# Altium PCB Humidifier_PCB.PcbDoc
Units mm, origin at the board's own origin, x right, y up, seen from the top; angles counter-clockwise.
Board outline 60.7 x 79 mm, 2 copper layers (Top Layer, Bottom Layer), stack 1 mm thick; 28 components, 25 nets, 99 pads, 4 vias.
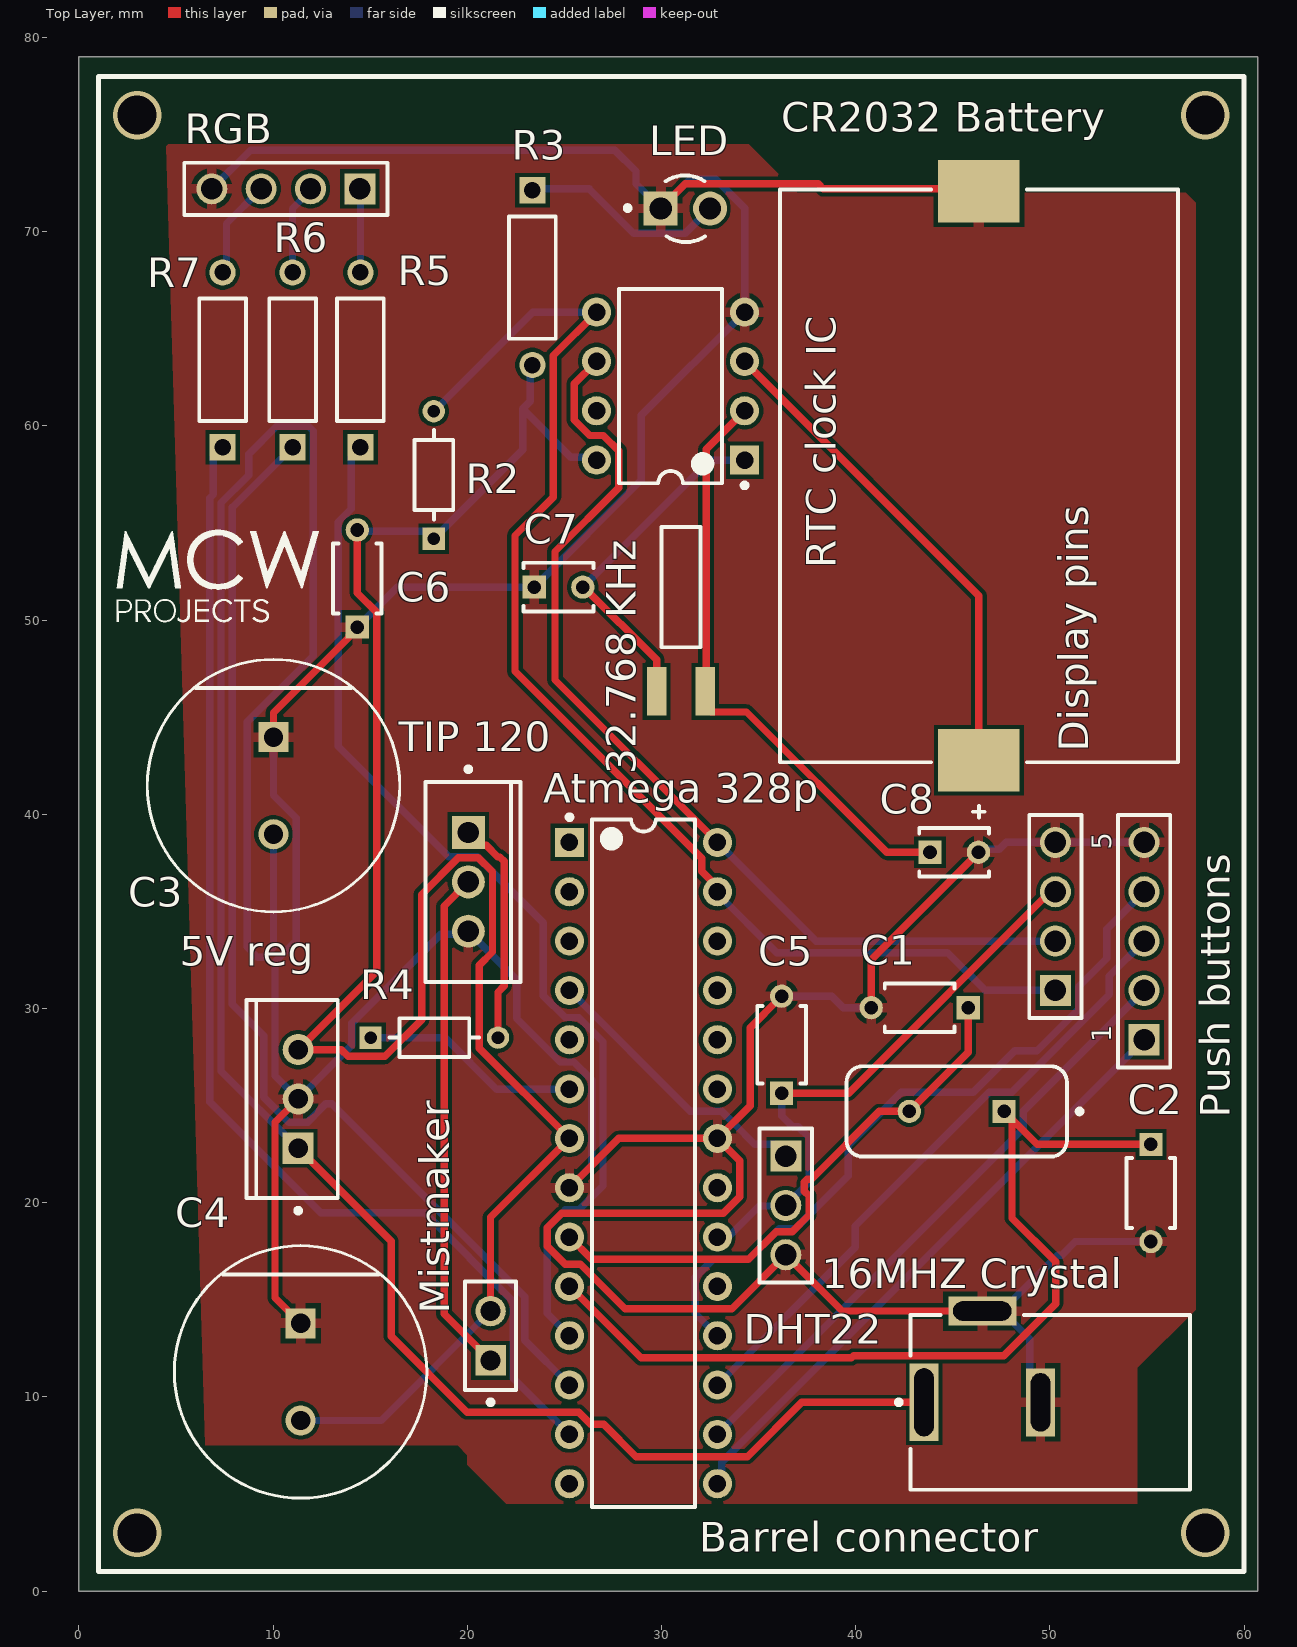
[diagram p0: Top Layer view]
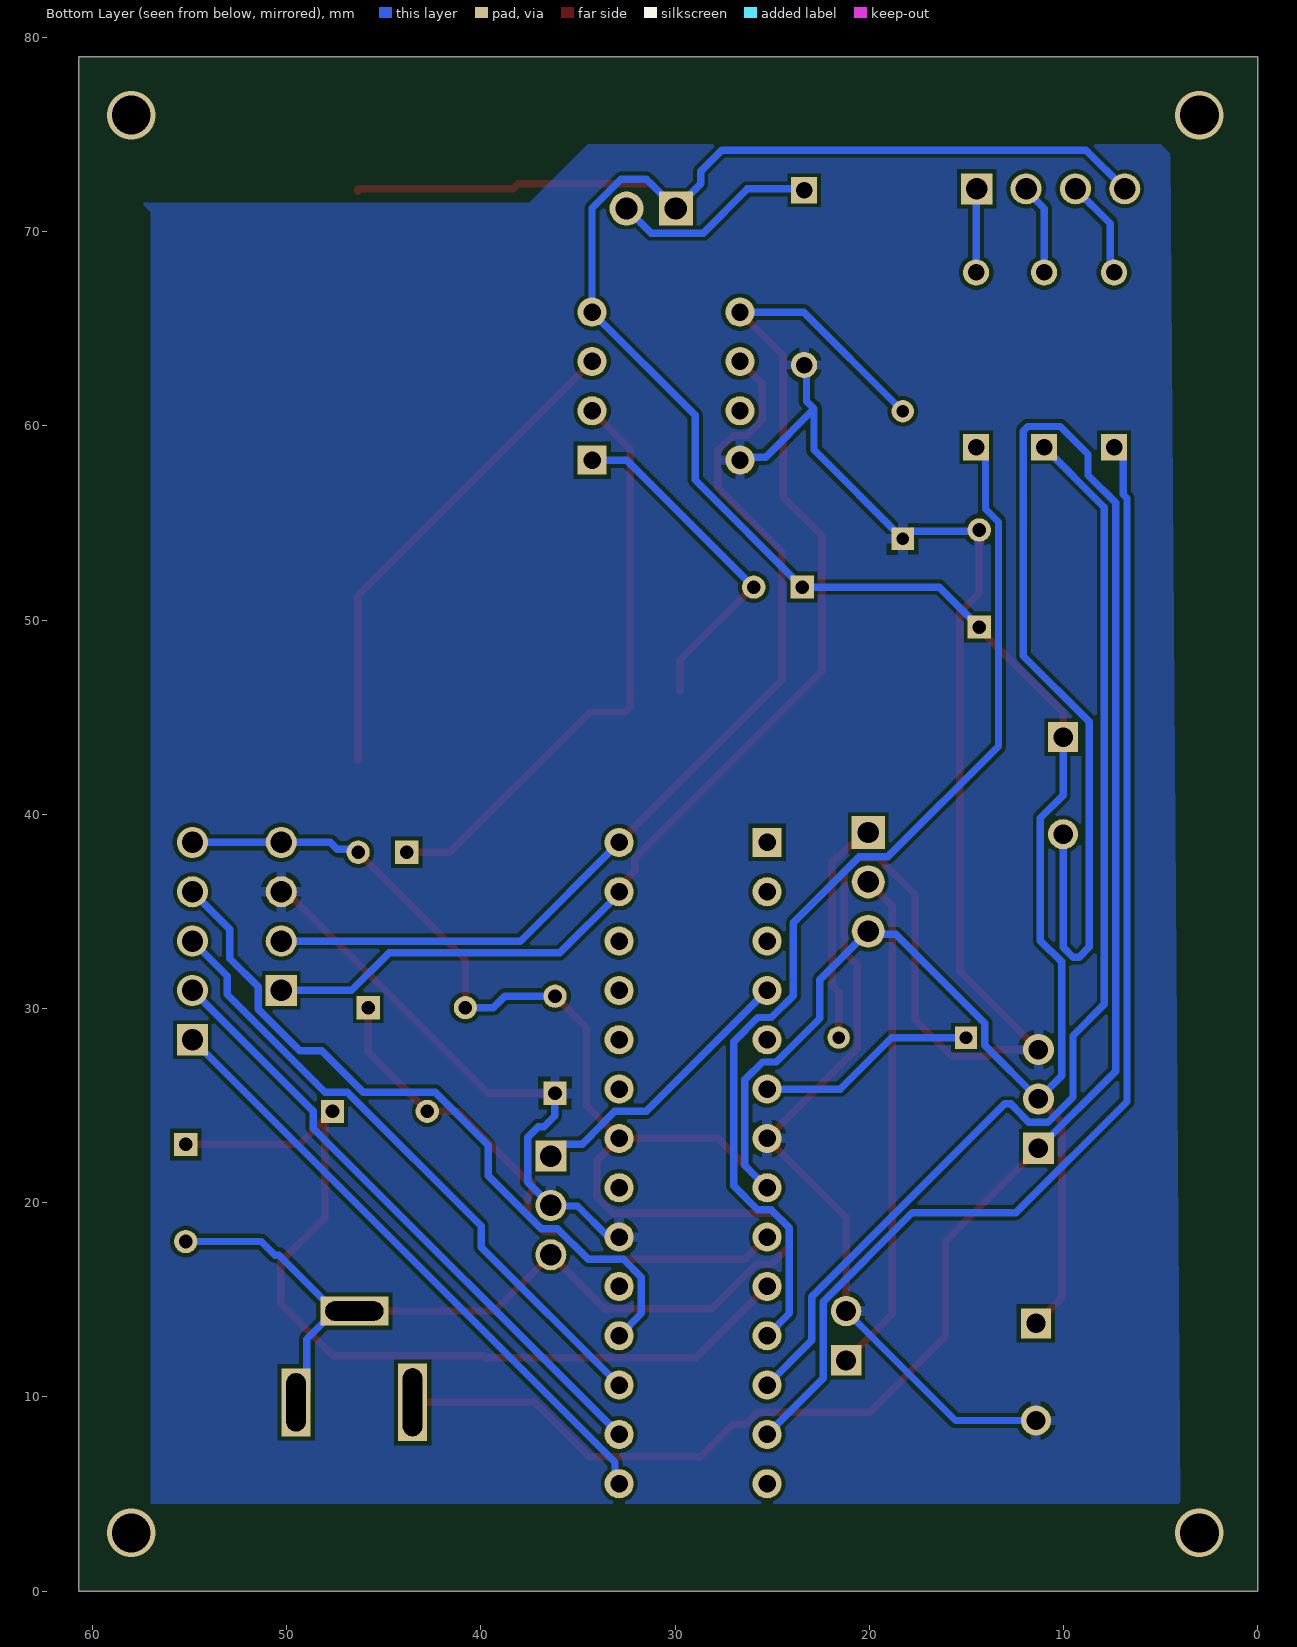
[diagram p1: Bottom Layer view, seen from below]
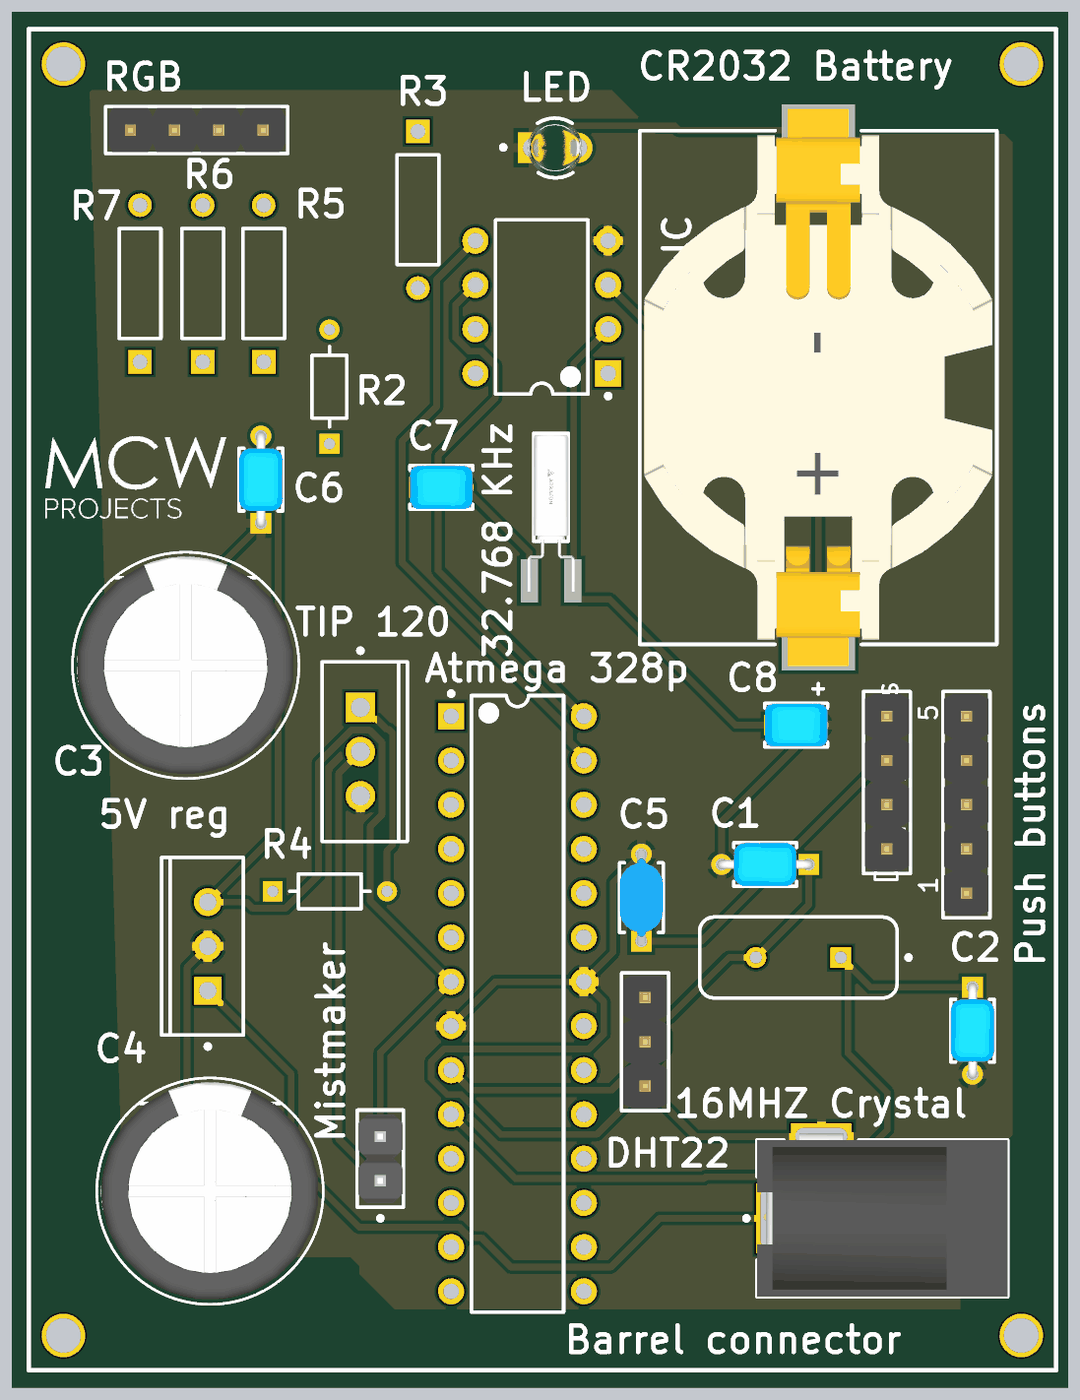
[diagram p2: 3D render of the assembled board from above, using the file's embedded part models]

## Layer stack, top to bottom
Top Solder: solder mask 0.0102, Solder Resist, Dk 3.5
Top Layer: signal copper 0.1
Dielectric 1: dielectric 0.8, FR-4, Dk 4.8
Bottom Layer: signal copper 0.1
Bottom Solder: solder mask 0.0102, Solder Resist, Dk 3.5

## Board outline
0,0 60.7,0 60.7,79 0,79

## Design rules (kind name [scope] priority, off if disabled: settings)
BoardOutlineClearance [All] p1: gap=0.2 ignorepadtopadclearanceinfootprint=FALSE except(0.4: Arc-SplitBarrior Arc-SplitContinuation Track-SplitBarrior Track-SplitContinuation SMDPad-SplitBarrior SMDPad-SplitContinuation THPad-SplitBarrior THPad-SplitContinuation Via-SplitBarrior Via-SplitContinuation Fill-SplitBarrior Fill-SplitContinuation Poly-SplitBarrior Poly-SplitContinuation Region-SplitBarrior Region-SplitContinuation Text-SplitBarrior Text-SplitContinuation)
Clearance "Clearance Bottom Layer" [OnLayer('Bottom Layer')] p1: gap=0.203 ignorepadtopadclearanceinfootprint=TRUE except(0.254: Arc-Text Track-Text SMDPad-Text THPad-Text Via-Text Fill-Text Poly-Text Region-Text Text-Text)
Clearance "Clearance Top Layer" [OnLayer('Top Layer')] p2: gap=0.203 ignorepadtopadclearanceinfootprint=TRUE except(0.254: Arc-Text Track-Text SMDPad-Text THPad-Text Via-Text Fill-Text Poly-Text Region-Text Text-Text)
Clearance [All] p3: gap=0.2 ignorepadtopadclearanceinfootprint=FALSE except(0.089: Arc-Arc Arc-Track Arc-SMDPad Track-Track Track-SMDPad SMDPad-SMDPad; 0.127: Arc-Via Track-Via SMDPad-Via THPad-Via Via-Via; 0.254: Arc-Text Track-Text SMDPad-Text THPad-Text Via-Text Fill-Text Poly-Text Region-Text Text-Text)
HoleSize [All] p1: absolutevalues=TRUE maxlimit=6.3 minlimit=0.2 maxpercent=80.000 minpercent=20.000
MinimumAnnularRing [All] p1: minimumring=0.076
MinimumSolderMaskSliver [All] p1: minsoldermaskwidth=0.1
PolygonConnect PolygonConnect_1 [All] p1: thpad.connectstyle=Relief thpad.reliefconductorwidth=0.508 thpad.reliefentries=4 thpad.polygonreliefangle="90 Angle" thpad.airgapwidth=0.254 smdpad.connectstyle=Relief smdpad.reliefconductorwidth=0.508 smdpad.reliefentries=4 smdpad.polygonreliefangle="90 Angle" smdpad.airgapwidth=0.254 via.connectstyle=Direct via.reliefconductorwidth=0.508 via.reliefentries=4 via.polygonreliefangle="90 Angle" via.airgapwidth=0.254
RoutingCorners [All] p1: cornerstyle=Round minsetback=2.54 maxsetback=2.54
RoutingVias [All] p1: holewidth=0.5 width=1 viastyle="Through Hole" minholewidth=0.2 minwidth=0.45 maxholewidth=1 maxwidth=2
SilkToSilkClearance [All] p1: silktosilkclearance=0.1
SilkToSolderMaskClearance [IsPad] p1: minsilkscreentomaskgap=0.1 clearancetoexposedcopper=TRUE
SolderMaskExpansion [All] p1: expansion=0.102 istentingtop=FALSE
Width [All] p1: maxlimit=2.54 minlimit=0.089 preferedwidth=0.381
25 further rules are at their usual default settings.

## Components (designator, comment, footprint, x,y, rotation, side; value= is the part's Value field where it differs from the comment)
"5V reg" "LM7805CT" FAIR-TO-220-3 11.291,25.343 r180 top
"16MHZ Crystal" "FOXSLF/160-20" FOX-FOXSLF160-20 45.2,24.7 r180 top
"32.768 KHz" "AB26TRB-32.768KHZ-T" FP-AB26TRB-MFG 31,51.7 r270 top
"Atmega 328p" "ATmega328-PU" 28P3 29.071,22.041 r0 top
"Barrel connector" "PJ-002A" CUI-PJ-002A_V 46.518,9.722 r0 top
C1 "RCE5C1H220J0K1H03B" FP-RCE0K1-MFG 43.295,30.042 r180 top
C2 "RCE5C1H220J0K1H03B" FP-RCE0K1-MFG 55.2,20.5 r270 top
C3 "EEUFR1A472L" FP-RAD-TH-D_12_5_0_5-L_30-MFG 10.021,41.472 r270 top
C4 "EEUFR1A472L" FP-RAD-TH-D_12_5_0_5-L_30-MFG 11.418,11.286 r270 top
C5 "RDER71H104K0M1H03A" FP-RDE0M1-MFG 36.183,28.137 r90 top
C6 "RCER71H104K0K1H03B" FP-RCE0K1-MFG 14.339,52.14 r90 top
C7 "RCE5C1H120J0DBH03A" FP-RCE0DB-MFG 24.7,51.7 r0 top
C8 "RCE5C1H120J0DBH03A" FP-RCE0DB-MFG 45.073,38.043 r0 top
"CR2032 Battery" "BU2032SM-HD-G" FP-BU2032SM-HD-G-MFG 46.343,57.429 r90 top
DHT22 "61300311121" 61300311121 36.4,19.86 r270 top
"Display pins" "61300411121" 61300411121 50.28,34.741 r90 top
LED "HLMP-1503" FP-HLMP-1503-MFG 31.23,71.19 r0 top
Mistmaker "M20-9990246" FP-M20-9990246-MFG 21.197,13.151 r90 top
"Push buttons" "61300511121" 61300511121 54.852,33.471 r90 top
R2 "CF18JT2K20" FP-CF18-MFG 18.276,57.474 r90 top value=2.2kΩ
R3 "MFR-25FBF52-1K" RESA60-630X240 23.356,67.634 r270 top
R4 "CF18JT2K20" FP-CF18-MFG 18.3,28.5 r0 top value=2.2kΩ
R5 "MFR-25FBF52-1K" RESA60-630X240 14.5,63.4 r90 top
R6 "MFR-25FBF52-1K" RESA60-630X240 11,63.4 r90 top
R7 "MFR-25FBF52-1K" RESA60-630X240 7.4,63.4 r90 top
RGB "61300411121" 61300411121 10.656,72.206 r180 top
"RTC clock IC" "DS1307+" P8+2 30.468,62.046 r180 top
"TIP 120" "TIP120G" ONSC-TO-220-3-221A-09 20.054,36.519 r0 top

## Footprints (in the part's own frame and the unit in brackets; to place one, negate y for a bottom-side part, rotate by r counter-clockwise, add the part's x,y. Pads: shape width x height; smd on the part's side, far side on the other; paste and mask are expansions set on the pad)
28P3 [mm] "28-Pin Plastic Dual In-Line Package (PDIP)"
  rect 1.5x1.5 hole 0.9: 1(-3.81,16.51)
  round 1.5 hole 0.9: 2(-3.81,13.97) 3(-3.81,11.43) 4(-3.81,8.89) 5(-3.81,6.35) 6(-3.81,3.81) 7(-3.81,1.27) 8(-3.81,-1.27) 9(-3.81,-3.81) 10(-3.81,-6.35) 11(-3.81,-8.89) 12(-3.81,-11.43) 13(-3.81,-13.97) 14(-3.81,-16.51) 15(3.81,-16.51) 16(3.81,-13.97) 17(3.81,-11.43) 18(3.81,-8.89) 19(3.81,-6.35) 20(3.81,-3.81) 21(3.81,-1.27) 22(3.81,1.27) 23(3.81,3.81) 24(3.81,6.35) 25(3.81,8.89) 26(3.81,11.43) 27(3.81,13.97) 28(3.81,16.51)
  silkscreen extent -3.93,-17.7 2.65,17.93, body extent -3.6,-17.65 3.6,17.65, height 4.58
61300311121 [mm] "Pin Header, pitch 2.54 mm, THT, Vertical, single row, 3p"
  rect 1.6x1.6 hole 1.1: 1(-2.54,0)
  round 1.6 hole 1.1: 2(0,0) 3(2.54,0)
  silkscreen extent -3.96,-1.35 3.96,1.35, body extent -3.81,-1.27 3.81,1.27, height 8.57
61300411121 [mm] "Pin Header, pitch 2.54 mm, THT, Vertical, single row, 4p"
  rect 1.6x1.6 hole 1.1: 1(-3.81,0)
  round 1.6 hole 1.1: 2(-1.27,0) 3(1.27,0) 4(3.81,0)
  silkscreen extent -5.23,-1.35 5.23,1.35, body extent -5.08,-1.27 5.08,1.27, height 8.57
61300511121 [mm] "Pin Header, pitch 2.54 mm, THT, Vertical, single row, 5p"
  rect 1.6x1.6 hole 1.1: 1(-5.08,0)
  round 1.6 hole 1.1: 2(-2.54,0) 3(0,0) 4(2.54,0) 5(5.08,0)
  silkscreen extent -6.5,-1.35 6.5,1.35, body extent -6.35,-1.27 6.35,1.27, height 8.57
CUI-PJ-002A_V [mm] "THD, 3-Leads, Body 14.4x9mm, Height 11mm"
  rect 1.5x4 hole 1 slot 3.5 at 90 deg: 1(-3,0)
  rect 1.5x3.5 hole 1 slot 3 at 90 deg: 2(3,0)
  rect 3.5x1.5 hole 1 slot 3 at 0 deg: 3(0,4.7)
  silkscreen extent -4.42,-4.5 10.7,4.5, body extent -3.7,-4.5 10.7,4.9, height 11
FAIR-TO-220-3 [mm] "FM, 3-Leads, Body 10.2x4.7mm, Pitch 2.54mm"
  rect 1.6x1.6 hole 1: 1(0,2.54)
  round 1.6 hole 1: 2(0,0) 3(0,-2.54)
  silkscreen extent -2.04,-5.1 2.66,5.87, body extent -2.04,-5.1 2.66,5.1, height 18.95
FOX-FOXSLF160-20 [mm] "THD, 2-Leads, Body 11.35x4.65mm"
  rect 1.2x1.2 hole 0.7: 1(-2.44,0)
  round 1.2 hole 0.7: 2(2.44,0)
  silkscreen extent -6.45,-2.32 5.68,2.32, body extent -5.67,-2.32 5.68,2.33, height 3.6
FP-AB26TRB-MFG [mm]
  rect 2.5x1 smd paste+0 mask+0: 1(5.375,1.25) 2(5.375,-1.25)
  silkscreen extent -3.1,-1 3.1,1, body extent -3.2,-1.85 6.73,1.85, height 0.25
FP-BU2032SM-HD-G-MFG [mm]
  rect 3.2x4.2 smd paste+0 mask+0: 1(14.65,0) 2(-14.65,0)
  silkscreen extent -17.6,-10.25 14.75,10.25, body extent -16.35,-10.35 16.35,10.35, height 0.25
FP-CF18-MFG [mm]
  rect 1.15x1.15 hole 0.65 paste-1000 mask+0: 1(-3.28,0)
  round 1.15 hole 0.65 paste-1000 mask+0: 2(3.28,0)
  silkscreen extent -2.3,-1 2.3,1
FP-HLMP-1503-MFG [mm]
  rect 1.75x1.75 hole 1.15 paste-1000 mask+0: 1(-1.27,0)
  round 1.75 hole 1.15 paste-1000 mask+0: 2(1.27,0)
  silkscreen extent -3.1,-1.73 1.02,1.71, body extent -2.42,-2.42 2.42,2.42, height 0.25
FP-M20-9990246-MFG [mm]
  rect 1.57x1.57 hole 1.02 paste-1000 mask+0: 1(-1.27,0)
  round 1.57 hole 1.02 paste-1000 mask+0: 2(1.27,0)
  silkscreen extent -3.55,-1.32 2.79,1.32, body extent -2.89,-1.42 2.89,1.42, height 0.25
FP-RAD-TH-D_12_5_0_5-L_30-MFG [mm]
  rect 1.55x1.55 hole 1 paste-1000 mask+0: 1(-2.5,0)
  round 1.55 hole 1 paste-1000 mask+0: 2(2.5,0)
  silkscreen extent -6.5,-6.5 6.5,6.5, body extent -6.6,-6.6 6.6,6.6, height 0.25
FP-RCE0DB-MFG [mm]
  rect 1.2x1.2 hole 0.7 paste-1000 mask+0: 1(-1.25,0)
  round 1.2 hole 0.7 paste-1000 mask+0: 2(1.25,0)
  silkscreen extent -1.8,-1.25 1.8,1.25, body extent -1.95,-1.35 1.95,1.35, height 0.25
FP-RCE0K1-MFG [mm]
  rect 1.2x1.2 hole 0.7 paste-1000 mask+0: 1(-2.5,0)
  round 1.2 hole 0.7 paste-1000 mask+0: 2(2.5,0)
  silkscreen extent -1.8,-1.25 1.8,1.25, body extent -3.2,-1.35 3.2,1.35, height 0.25
FP-RDE0M1-MFG [mm]
  rect 1.2x1.2 hole 0.7 paste-1000 mask+0: 1(-2.5,0)
  round 1.2 hole 0.7 paste-1000 mask+0: 2(2.5,0)
  silkscreen extent -2,-1.25 2,1.25, body extent -3.2,-1.35 3.2,1.35, height 0.25
ONSC-TO-220-3-221A-09 [mm] "FM, 3-Leads, Body 10.3x4.85mm, Pitch 2.54mm"
  rect 1.7x1.7 hole 1.1: 1(0,2.54)
  round 1.7 hole 1.1: 2(0,0) 3(0,-2.54)
  silkscreen extent -2.2,-5.15 2.7,5.92, body extent -2.18,-5.15 2.67,5.15, height 19.85
P8+2 [mm] "DIP, 8-Leads, Row Spacing 7.62mm, Pitch 2.54mm, Body 9.4x7mm"
  rect 1.5x1.5 hole 0.9: 1(-3.81,3.81)
  round 1.5 hole 0.9: 2(-3.81,1.27) 3(-3.81,-1.27) 4(-3.81,-3.81) 5(3.81,-3.81) 6(3.81,-1.27) 7(3.81,1.27) 8(3.81,3.81)
  silkscreen extent -3.94,-5 2.65,5.23, body extent -3.6,-4.95 3.6,4.95, height 4.57
RESA60-630X240 [mm] "Axial Resistor, 2-Leads, Dia 2.4mm, Body Length 6.3mm"
  rect 1.35x1.35 hole 0.85: 1(-4.5,0)
  round 1.35 hole 0.85: 2(4.5,0)
  silkscreen extent -3.15,-1.2 3.15,1.2, body extent -3.15,-1.2 3.15,1.2, height 2.4

## Part data
"5V reg": library part CMP-2000-04938-1, "Positive Voltage Regulator, 5 V, 1 A, -40 to 125 degC, 3-Pin TO-220, RoHS, Tube", Manufacturer=FairchildSemiconductor, Maximum Input Voltage=35V, Maximum Output Current=2.2(Typ)A, Maximum Quiescent Current=8mA, Operating Temperature=-40to125degC, Output Voltage=5V, Package=3TO-220AB, Package Description="3-Pin Through Hole Device, Body 10 x 4.5 mm, Pitch 2.54 mm", Package Reference=TO-220, Typical Dropout Voltage @ Current=2@1AV, Accuracy=±4%, Category=LinearRegulator, Datasheet URL=https://datasheet.ciiva.com/26904/lm7805ct-26904988.pdf, Datasheet Version=Aug-12, Line Regulation=100mV, Load Regulation=100mV, Manufacturer URL=https://www.fairchildsemi.com/, Mounting=ThroughHole, Number of Outputs=1, Output Type=Fixed, Package URL=https://www.fairchildsemi.com/package-drawings/TO/TO220B03.pdf, Packaging=Rail/Tube, Polarity=Positive, Rad Hard=No, Type=Linear
"16MHZ Crystal": library part CMP-1749-00003-1, "Resistance Weld Thru-Hole Crystal, 16 MHz, -20 to 70 degC, 2-Pin THD, RoHS, Bulk", Case\Package=Axial, Max Operating Temperature="155 degC", Min Operating Temperature="-55 degC", Package Quantity=200, Power Rating="250 mW", Resistance="221 kohm", Tolerance=1%, Voltage Rating="250 V", ComponentLink1Description="Manufacturer URL", ComponentLink1URL=http://www.foxonline.com/, ComponentLink2Description=Datasheet, ComponentLink2URL=http://www.foxonline.com/pdfs/hc49slf.pdf, DatasheetVersion=Mar-15, Length="0.248 inch", Mount="Through Hole", PackageDescription="2-Pin Through Hole Device, Body 11.35 x 4.65 mm", PackageReference=FOXSLF160-20, Packaging=Bulk, RoHSCompliant=true
"32.768 KHz": library part CMP-27762-006068-1, "CRYSTAL 32.7680KHZ 12.5PF TH", Case/Package=Radial, ESR (Equivalent Series Resistance)=50kR, Frequency=32.768kHz, Frequency Stability=-0.034ppm, Frequency Tolerance=20ppm, Load Capacitance=12.5pF, Max Operating Temperature=85°C, Min Operating Temperature=-40°C, Operating Frequency="32.768 kHz", Package Quantity=500, Depth=1.9mm, Height=0.075inch, Lead Free="Lead Free", Lead Pitch=2.54mm, Length=6mm, Mount="Surface Mount", Number of Pins=2, Packaging="Tape and Reel", REACH SVHC="No SVHC", Series=AB26TRB, Series Resistance=50kR, Termination=Radial, Tolerance=20ppm
"Atmega 328p": library part CMP-0095-00015-2, "8-bit AVR Microcontroller, 32KB Flash, 1KB EEPROM, 2KB SRAM, 28-pin PDIP, Industrial Grade (-40°C to 85°C)", ComponentLink1Description="Manufacturer URL", ComponentLink1URL=http://www.atmel.com/, ComponentLink2Description="ATmega48A/48PA/88A/88PA/168A/168PA/328/328P Datasheet", ComponentLink2URL=http://www.atmel.com/dyn/resources/prod_documents/8271.pdf, ComponentLink3Description="ATmega48A/48PA/88A/88PA/168A/168PA/328/328P Summary", ComponentLink3URL=http://www.atmel.com/dyn/resources/prod_documents/8271S.pdf, DatasheetVersion="revD, May-2011", PackageDescription="28-lead (0.300\"/7.62mm Wide) Plastic Dual Inline Package (PDIP)", PackageReference=28P3, PackageVersion="revB, Sep-2001", RevisionNote="DatasheetVersion updated. URLs added."
"Barrel connector": library part CMP-2000-06895-2, "Through Hole Right Angle DC Power Jack, 2.5 A, 2 mm Center Pin, 3 Position, -25 to 85 degC, RoHS, Bulk", Current Rating=2.5A, Flammability Rating=UL94V-0, Insulation Resistance=50MOhms, Manufacturer=CUIInc., Operating Temperature Range=-25Cto+85C, Package Description="3-Pin Through Hole Device, Body 14.4 x 9 mm, Height 11 mm", Voltage Rating=24V, Brand=CUI, Connector Type=DCPowerJack, Contact Gender=Male, Contact Material=Copper, Contact Plating=Nickel, Datasheet URL=http://www.cui.com/product/resource/pj-002a.pdf, Datasheet Version="Rev. 1.03, 04/2016", Factory Pack Quantity=500, Housing Material=PolybutyleneTerephthalate(PBT), Inside Contact Diameter=2mm, Manufacturer URL=http://www.cui.com/, Mounting Angle=Right, Mounting Style=ThroughHole, Mounting Technology=ThroughHole, Outside Contact Diameter=6.5mm, Package Reference=PJ-002A, Product=Jacks, Product Category=DCPowerConnectors, RoHS=True, Termination Style=ThroughHole
C1 C2: library part CMP-06035-047580-1, "Cap Ceramic 22pF 50V C0G ±5% Radial 5mm +125°C Automotive Bulk", Capacitance=22pF, Case/Package=Radial, Dielectric=C0G, Max Operating Temperature=125°C, Min Operating Temperature=-55°C, Package Quantity=500, Ratings=AEC-Q200, Resistor Type=Ceramic, Tolerance=5%, Voltage Rating=50V, Height=3.5mm, Height - Seated (Max)=0.138inch, Lead Diameter=0.5mm, Lead Pitch=0.197inch, Lead/Base Style="Formed Leads", Length=0.142inch, Mount="Through Hole", Packaging=Bulk, Termination=Radial, Voltage Rating (DC)=50V, Width=0.098inch
C3 C4: library part CMP-05427-001008-1, "Aluminum Electrolytic Capacitors (Radial Lead Type) 4700uF ±20% 10V", Capacitance=4.7mF, Case/Package=Radial, Dielectric Material=Aluminium, ESR (Equivalent Series Resistance)=13mR, Max Operating Temperature=105°C, Min Operating Temperature=-40°C, Package Quantity=100, Ripple Current=3.63A, Tolerance=20%, Voltage=10V, Construction=RADIAL, Diameter=12.5mm, Height=30mm, Height - Seated (Max)=1.26inch, Impedance=13mR, Lead Diameter=0.8mm, Lead Pitch=5mm, Lead/Base Style=Straight, Length=30mm, Life (Hours)=10000Hour, Mount="Through Hole", Number of Pins=2, Packaging=Bulk, Radiation Hardening=No, REACH SVHC=Yes, Ripple Current (AC)=3.63A, RoHS Compliant=Yes, Series=FR, Termination=Radial, Voltage Rating=10V, Voltage Rating (DC)=10V
C5: library part CMP-06035-051680-1, "Ceramic Capacitor 100nF ±10% 50V X7R Radial", Capacitance=100nF, Case/Package=Radial, Dielectric=X7R, Max Operating Temperature=125°C, Min Operating Temperature=-55°C, Package Quantity=2000, Resistor Type=Ceramic, Tolerance=10%, Voltage Rating=50V, Height=3.5mm, Height - Seated (Max)=0.236inch, Lead Diameter=0.5mm, Lead Free="Lead Free", Lead Pitch=0.197inch, Lead/Base Style=Kinked, Length=0.157inch, Mount="Through Hole", Packaging="Tape and Reel", Termination=Radial, Voltage Rating (DC)=50V, Width=3.5mm
C6: library part CMP-06035-058483-1, "Cap Ceramic 100nF 50V X7R ±10% Radial 5mm +125°C Automotive Bulk", Capacitance=100nF, Case/Package=Radial, Dielectric=X7R, Max Operating Temperature=125°C, Min Operating Temperature=-55°C, Package Quantity=500, Ratings=AEC-Q200, Resistor Type=Ceramic, Tolerance=10%, Voltage=50V, Depth=2.5mm, Height=3.5mm, Height - Seated (Max)=0.138inch, Lead Diameter=0.5mm, Lead Free="Lead Free", Lead Pitch=0.197inch, Lead/Base Style="Formed Leads", Length=3.6mm, Mount="Through Hole", Packaging=Bulk, Termination=Radial, Voltage Rating=50V, Voltage Rating (DC)=50V, Width=0.098inch
C7 C8: library part CMP-06035-009458-1, "Cap Ceramic 12pF 50V C0G ±5% Radial 2.5mm +125°C Ammo Pack", Capacitance=12pF, Case/Package=Radial, Dielectric=C0G, Max Operating Temperature=125°C, Min Operating Temperature=-55°C, Package Quantity=2000, Ratings=AEC-Q200, Resistor Type=Ceramic, Tolerance=5%, Voltage Rating=50V, Height=3.5mm, Height - Seated (Max)=0.138inch, Lead Diameter=0.5mm, Lead Pitch=0.098inch, Lead/Base Style=Straight, Length=0.138inch, Mount="Through Hole", Packaging="Tape and Reel", Termination=Radial, Voltage Rating (DC)=50V, Width=0.098inch
"CR2032 Battery": library part CMP-136216-000005-1, "BATTERY HOLDER COIN 20MM SMD", Case/Package=SMD/SMT, Max Operating Temperature=280°C, Min Operating Temperature=-40°C, Package Quantity=1, Diameter=20mm, Lead Free="Lead Free", Mount="Surface Mount", Number of Cells=1, Packaging="Cut Tape", Termination=SMD/SMT
DHT22: library part CMP-1502-01062-1, "THT Vertical Pin Header WR-PHD, Pitch 2.54 mm, Single Row, 3 pins", Contact Resistance=20mOhm, Manufacturer="Wurth Elektronik", Operating Temperature=-40to105degC, Rated Current=3A, Withstanding Voltage=500VAC, Working Voltage=250VAC, Datasheet URL=https://katalog.we-online.de/em/datasheet/6130xx11121.pdf, Gender=Male, Manufacturer URL=http://www.we-online.de, Mounting Technology=THT, Orientation=Vertical, Package Reference=61300311121, Packaging=Bag, Part Number=61300311121, Pin Number=3, Pitch=2.54mm, Publisher=WurthElektronik, Row Number=Single
"Display pins" RGB: library part CMP-1502-01064-1, "THT Vertical Pin Header WR-PHD, Pitch 2.54 mm, Single Row, 4 pins", Contact Resistance=20mOhm, Manufacturer="Wurth Elektronik", Operating Temperature=-40to105degC, Rated Current=3A, Withstanding Voltage=500VAC, Working Voltage=250VAC, Datasheet URL=https://katalog.we-online.de/em/datasheet/6130xx11121.pdf, Gender=Male, Manufacturer URL=http://www.we-online.de, Mounting Technology=THT, Orientation=Vertical, Package Reference=61300411121, Packaging=Bag, Part Number=61300411121, Pin Number=4, Pitch=2.54mm, Publisher=WurthElektronik, Row Number=Single
LED: library part CMP-18399-000010-1, "LED GREEN DIFFUSED T-1 T/H", Colour=Green, Forward Current=10mA, Forward Voltage=2.1V, Manufacturer=Broadcom, Max Junction Temp=+110°C, Reverse Voltage=5V, Temperature="-20°C to +100°C", Temperature Range High=+100°C, Temperature Range Low=-20°C, Automotive=No, Category=Diode, ComponentLink2Description=Datasheet, ComponentLink2URL=https://docs.broadcom.com/docs/AV02-1555EN, Device Class L1=Optoelectronics, Device Class L2=LEDs, Device Class L3=unset, Digikey Description="LED GREEN DIFFUSED T-1 T/H", Height=6.35mm, Lead Free=Yes, Led Orientation=Straight, Luminous Intensity=1mcd, Manufacturer Part Number=HLMP-1503, Mouser Description="LED; Green; 1mcd; 0.115In.Dia.; T-1; 565nm; 25mA; 2.1V; 5V; GaP; -20degC; 100deg", Octopart=https://octopart.com/hlmp-1503-broadcom-71130371, Package=HLMP-1503, Peak Emmision Wavelength=565nm, RoHS=TRUE, Standoff Height=0.88mm, Viewing Angle=60°, Wavelength=569nm
Mistmaker: library part CMP-15831-000009-1, "CONN HEADER VERT 2POS 2.54MM", Current Rating=3A, Manufacturer=Harwin, Temperature="-40°C to +105°C", Temperature Range High=+105°C, Temperature Range Low=-40°C, Automotive=No, Category=Conn, ComponentLink2Description=Datasheet, ComponentLink2URL=https://cdn.harwin.com/pdfs/M20-999.pdf, Conn Gender=Male, Conn Orientation=Vertical, Contact Material=Tin,Nickel, Device Class L1=Connectors, Device Class L2="Headers and Wire Housings", Device Class L3=unset, Digikey Description="CONN HEADER VERT 2POS 2.54MM", Height=8.99mm, Lead Free=Yes, Manufacturer Part Number=M20-9990246, Mouser Description="2.54mm (0.1\") Pitch SIL Vertical PC Tail Pin Header, 6.1mm mating pin height, tin, 2 contacts", Number Of Contacts=2, Number Of Rows=1, Octopart=https://octopart.com/m20-9990246-harwin-2590635, Package=M20-9990246, Pitch=2.54mm, RoHS=TRUE
"Push buttons": library part CMP-1502-01068-1, "THT Vertical Pin Header WR-PHD, Pitch 2.54 mm, Single Row, 5 pins", Contact Resistance=20mOhm, Manufacturer="Wurth Elektronik", Operating Temperature=-40to105degC, Rated Current=3A, Withstanding Voltage=500VAC, Working Voltage=250VAC, Datasheet URL=https://katalog.we-online.de/em/datasheet/6130xx11121.pdf, Gender=Male, Manufacturer URL=http://www.we-online.de, Mounting Technology=THT, Orientation=Vertical, Package Reference=61300511121, Packaging=Bag, Part Number=61300511121, Pin Number=5, Pitch=2.54mm, Publisher=WurthElektronik, Row Number=Single
R2 R4: library part CMP-26528-000001-1, "RES 2.2K OHM 1/8W 5% CF AXIAL", Manufacturer="Stackpole Electronics Inc", Package=CF18, Power Rating=0.125W, Resistance=2.2kΩ, Temperature="-55°C to +155°C", Temperature Coefficient=0/-400ppm/°C, Temperature Range High=+155°C, Temperature Range Low=-55°C, Tolerance=5%, Voltage Rating=250V, Automotive=No, Category=Res, ComponentLink2Description=Datasheet, ComponentLink2URL=https://www.seielect.com/catalog/sei-cf_cfm.pdf, Composition="Carbon Film", Device Class L1="Passive Components", Device Class L2=Resistors, Device Class L3="Through-Hole Resistors", Digikey Description="RES 2.2K OHM 1/8W 5% CF AXIAL", Height=2mm, Ipc Land Pattern Name=RESAD656W65L360D200, Lead Free=Yes, Manufacturer Part Number=CF18JT2K20, Octopart=https://octopart.com/cf18jt2k20-stackpole+electronics-19205714, RoHS=TRUE, Series=CF
R3 R5 R6 R7: library part CMP-1659-00075-1, "Axial Resistor, 1 KOhm, +/- 1%, 250 mW, -55 to 155 degC, 2-Pin THD, RoHS, Bulk", Case\Package=Axial, Max Operating Temperature="155 degC", Min Operating Temperature="-55 degC", Package Quantity=200, Power Rating="250 mW", Resistance="10 kohm", Tolerance=1%, Voltage Rating="250 V", ComponentLink1Description="Manufacturer URL", ComponentLink1URL=http://www.yageo.com/, ComponentLink2Description=Datasheet, ComponentLink2URL=http://www.yageo.com/documents/recent/Yageo%20LR_MFR_2013.pdf, DatasheetVersion=Apr-13, Length="0.248 inch", PackageDescription="2-Pin Axial Lead, Dia 2.4 mm, Body Length 6.3 mm", PackageReference=MFR-25, Packaging=Bulk, RoHSCompliant=true
"RTC clock IC": library part CMP-0254-00152-1, "64 x 8, Serial, I2C Real-Time Clock, 5.0V, 8-Pin PDIP, 0 to 70 degC, Pb-Free", Code_JEDEC=MS-001-AB, ComponentLink1Description="Manufacturer URL", ComponentLink1URL=http://www.maxim-ic.com, ComponentLink2Description=Datasheet, ComponentLink2URL=http://datasheets.maxim-ic.com/en/ds/DS1307.pdf, ComponentLink3Description="Package Specification", ComponentLink3URL=http://pdfserv.maxim-ic.com/package_dwgs/21-0043.PDF, DatasheetVersion=10-Feb-2008, PackageDescription="8-Pin Plastic Dual-In-Line, Narrow (0.3in), Pitch 2.54 mm, PDIP(N), Pb-Free", PackageReference=P8+2, PackageVersion="revE, 2011"
"TIP 120": library part CMP-1047-00134-1, "Plastic Medium-Power, Complementary Silicon Transistor, 3-Pin TO-220, Pb-Free, Tube", Manufacturer="On Semiconductor", ComponentLink1Description="Manufacturer URL", ComponentLink1URL=http://www.onsemi.com/, ComponentLink2Description=Datasheet, ComponentLink2URL=http://www.onsemi.cn/pub_link/Collateral/TIP120-D.PDF, ComponentLink3Description="Package Specification", ComponentLink3URL=http://www.onsemi.com/pub_link/Collateral/221A-09.PDF, DatasheetVersion="Rev. 8", IC Continuous (A)=5, Mounting Technology="Through Hole", PackageDescription="3-Pin Flange Mount, Vertical Straight Lead, Body 9.97 x 4.445 mm, Pitch 2.54 mm", PackageReference=TO-220-3-221A-09, PackageVersion="Rev. AG, 09/2011", Packing=Tube, PartNumber=TIP120G, Polarity=NPN, RoHS=TRUE

## Via types
v1: diameter 2.5, hole 2, Top Layer to Bottom Layer, 4 vias

## Nets (pads, with @x,y where several pads share a name; then routed paths per layer and width w, separated by ;. In a path a pad name is that pad's centre, name@x,y a point inside that pad or via, vN(x,y) a via of type N, cw(c..) or ccw(c..) an arc to the next point about the centre after c; other vN are vias at no path point)
"5V net": "5V reg.3" "Atmega 328p.7" "Atmega 328p.20" "Display pins.3" "RTC clock IC.8" C4.2 C5.1 C6.2 DHT22.2 Mistmaker.2 R2.1 R3.2 | length 136.1
  Top Layer w0.381: C6.2 14.339,51.397 15.333,50.403 15.333,31.925 11.291,27.883 13.514,27.883 13.865,27.531 15.758,27.531 17.648,29.422 17.648,35.872 19.539,37.763 20.569,37.763 21.298,37.034 21.298,32.91 20.611,32.223 20.611,27.961 25.261,23.311 25.389,23.311 25.4,23.3 25.25,23.3 21.197,19.247 Mistmaker.2 ; C5.1 39.633,25.637 50.007,36.011 50.28,36.011 50.311,36.011
  Bottom Layer w0.381: 11.2,27.9 11.217,27.883 11.291,27.883 ; C4.2 15.562,8.786 Mistmaker.2 ; C6.2 14.44,54.64 14.5,54.7 14.622,54.578 17.892,54.578 R2.1 22.848,58.766 22.848,60.881 ; R3.2 23.366,63.134 23.4,63.1 23.233,62.933 23.233,61.266 22.848,60.881 ; 26.658,58.236 26.501,58.393 25.336,58.393 22.848,60.881 ; 32.881,18.231 32.95,18.3 33.5,18.3 35.028,19.828 36.368,19.828 DHT22.2 37.594,21.054 37.594,23.363 37.042,23.914 36.751,23.914 36.2,24.465 36.2,25.6 36.183,25.617 C5.1
GND: "5V reg.2" "Atmega 328p.8" "Atmega 328p.22" "Barrel connector.2" "Barrel connector.3" "CR2032 Battery.1" "Display pins.4" "Push buttons.5" "RTC clock IC.4" "TIP 120.3" C1.2 C2.2 C3.1 C4.1 C5.2 C6.1 C7.1 C8.2 DHT22.3 LED.1 RGB.4 | length 251.2
  Top Layer w0.381: C3.1 10.021,45.221 13.929,49.13 13.929,49.23 C6.1 ; 11.291,25.343 10.097,24.149 10.097,15.107 11.386,13.818 11.386,13.786 C4.1 ; 25.261,20.771 25.261,20.739 25.3,20.7 25.3,20.81 27.801,23.311 32.881,23.311 ; LED.1 31.229,72.459 38.075,72.459 38.333,72.2 46.3,72.2 46.343,72.157 46.343,72.079 ; C5.2 36.163,30.637 36.1,30.7 36.1,30.554 34.561,29.015 34.561,24.991 32.881,23.311 ; C1.2 40.795,32.515 46.2,37.92 46.2,38 46.243,38.043 C8.2 ; 46.518,14.422 39.298,14.422 36.52,17.2 36.4,17.2 DHT22.3 33.627,14.547 28.119,14.547 25.831,16.835 25.04,16.835 24.117,17.757 24.117,18.705 24.862,19.449 33.177,19.449 34.025,20.297 34.025,22.167 32.9,23.292 32.9,23.3 32.889,23.311 32.881,23.311
  Bottom Layer w0.381: RGB.4 8.84,74.2 27.6,74.2 28.688,73.112 28.688,72.462 LED.1 31.47,72.7 32.784,72.7 34.278,71.206 34.278,65.856 28.962,60.54 28.962,57.212 C7.1 16.399,51.7 C6.1 C6.1@14.339,49.539 ; C3.1 10.021,40.979 11.19,39.81 11.19,33.498 10.097,32.405 10.097,26.537 11.291,25.343 14.051,28.103 14.051,29.238 18.633,33.819 19.619,33.819 19.8,34 19.821,33.979 20.054,33.979 20.054,33.946 20.1,33.9 20.133,33.9 22.547,31.486 22.547,29.488 24.787,27.247 25.482,27.247 26.405,26.325 26.405,21.915 25.261,20.771 ; C4.1@11.4,14 11.418,13.982 C4.1 ; C6.1@14.3,49.5 C6.1@14.339,49.539 ; C6.1@14.341,49.541 C6.1@14.339,49.539 ; C5.2 38.763,30.637 38.9,30.5 39.358,30.042 C1.2 ; C8.2 46.48,38.2 47.4,38.2 47.751,38.551 50.28,38.551 50.28,38.68 50.3,38.7 50.3,38.6 50.349,38.551 54.852,38.551 ; 46.518,14.422 47.518,14.422 ; 49.518,9.722 48.959,10.282 48.959,12.982 47.518,14.422 ; C2.2 51.3,18 50.6,17.3 50.396,17.3 47.518,14.422
"Net5V reg_1": "5V reg.1" "Barrel connector.1" C3.2 | length 120.7
  Top Layer w0.381: 11.2,22.7 11.291,22.791 11.291,22.803 16.075,18.019 16.075,13.125 19.985,9.215 25.735,9.215 26.349,8.6 27.017,8.6 28.689,6.927 34.427,6.927 37.221,9.722 43.518,9.722
  Bottom Layer w0.381: C3.2 10.021,33.155 9.513,32.647 9.197,32.647 8.675,33.17 8.675,44.757 12.069,48.151 12.069,59.738 11.838,59.969 10.162,59.969 8.739,58.546 8.739,57.465 7.316,56.042 7.316,26.778 11.291,22.803 ; 43.4,9.8 43.478,9.722 43.518,9.722
"Net16MHZ Crystal_1": "16MHZ Crystal.1" "Atmega 328p.10" C2.1 | length 46.4
  Top Layer w0.381: 25.261,15.691 28.945,12.007 39.784,12.007 39.892,12.116 47.616,12.116 50.3,14.8 50.3,16.955 48.05,19.206 48.05,24.29 ; 47.64,24.7 47.64,24.66 47.68,24.66 48.05,24.29 ; C2.1 49.34,23 48.05,24.29
"Net16MHZ Crystal_2": "16MHZ Crystal.2" "Atmega 328p.9" C1.1 | length 29.1
  Top Layer w0.381: 25.261,18.231 26.405,17.087 34.479,17.087 35.906,18.514 36.742,18.514 37.594,19.366 37.594,20.354 37.349,20.599 37.349,21.052 37.504,21.206 37.722,21.206 41.216,24.7 42.76,24.7 45.8,27.74 45.8,30 45.795,30.005 C1.1
"Net32.768 KHz_1": "32.768 KHz.1" "RTC clock IC.2" C8.1 | length 30.9
  Top Layer w0.381: 32.25,46.325 32.275,46.325 32.3,46.3 ; 34.278,60.776 32.3,58.798 32.3,46.3 ; C8.1 41.598,38.043 34.375,45.266 32.56,45.266 32.3,45.525 32.3,46.3
  Bottom Layer w0.381: 34.2,60.7 34.276,60.776 34.278,60.776
"Net32.768 KHz_2": "32.768 KHz.2" "RTC clock IC.1" C7.2 | length 18.3
  Top Layer w0.381: C7.2 26,51.7 29.75,47.95 29.75,46.325 ; 34.242,58.2 34.4,58.2 34.364,58.236 34.278,58.236
  Bottom Layer w0.381: C7.2 25.975,51.7 25.975,51.725 32.486,58.236 34.278,58.236
"NetAtmega 328p_4": "Atmega 328p.4" DHT22.1 | length 14.7
  Bottom Layer w0.381: 25.261,30.931 31.485,24.707 33.102,24.707 34.3,23.509 34.3,23.5 34.79,23.01 35.79,23.01 DHT22.1
"NetAtmega 328p_6": "Atmega 328p.6" R4.1 | length 11.3
  Bottom Layer w0.381: R4.1 18.857,28.5 21.506,25.851 25.261,25.851
"NetAtmega 328p_11": "Atmega 328p.11" R5.1 | length 55.2
  Bottom Layer w0.381: R5.1 14.016,58.415 14.016,55.722 13.345,55.052 13.345,43.511 19.041,37.815 20.517,37.815 23.911,34.421 23.911,30.664 25.04,29.535 25.735,29.535 26.989,28.281 26.989,20.881 25.735,19.627 25.04,19.627 24.117,18.705 24.117,14.295 25.261,13.151
"NetAtmega 328p_12": "Atmega 328p.12" R6.1 | length 59.4
  Bottom Layer w0.381: R6.1 7.9,55.8 7.9,30.211 9.513,28.598 9.513,25.433 10.797,24.149 11.785,24.149 12.485,24.849 12.485,24.864 12.708,25.088 13.024,25.088 22.96,15.151 22.96,12.912 25.261,10.611
"NetAtmega 328p_13": "Atmega 328p.13" R7.1 | length 61.9
  Bottom Layer w0.381: R7.1 6.916,58.415 6.916,56.468 6.732,56.284 6.732,25.206 12.456,19.481 17.804,19.481 22.376,14.909 22.376,10.956 25.261,8.071
"NetAtmega 328p_15": "Atmega 328p.15" "Push buttons.1" | length 32
  Bottom Layer w0.381: 32.881,5.531 33.095,5.745 33.095,6.634 54.852,28.391
"NetAtmega 328p_16": "Atmega 328p.16" "Push buttons.2" | length 32.1
  Bottom Layer w0.381: 32.881,8.071 48.634,23.824 48.634,24.713 54.7,30.779 54.7,31 54.769,30.931 54.852,30.931
"NetAtmega 328p_17": "Atmega 328p.17" "Push buttons.3" | length 32.7
  Bottom Layer w0.381: 32.881,10.611 39.986,17.716 39.986,18.803 46.877,25.694 48.026,25.694 53.052,30.72 53.052,31.671 54.852,33.471 54.871,33.471
"NetAtmega 328p_18": "Atmega 328p.18" "Push buttons.4" | length 37.4
  Bottom Layer w0.381: 32.881,13.151 31.737,14.295 31.737,16.165 32.66,17.087 34.479,17.087 36.058,18.666 36.894,18.666 39.621,21.393 39.621,22.967 42.348,25.694 46.051,25.694 48.188,27.831 49.337,27.831 51.474,29.968 51.474,31.117 52.931,32.574 52.931,34.09 54.7,35.859 54.7,36 54.711,36.011 54.852,36.011
"NetAtmega 328p_27": "Atmega 328p.27" "Display pins.1" "RTC clock IC.5" R2.2 | length 66.1
  Top Layer w0.381: 26.658,65.856 24.425,63.623 24.425,56.323 22.456,54.355 22.456,47.358 32.072,37.742 32.072,37.071 32.881,36.262 32.881,36.011
  Bottom Layer w0.381: R2.2 18.276,60.976 18.3,61 18.522,61 23.378,65.856 26.658,65.856 ; 32.881,36.011 32.881,35.919 35.935,32.865 44.728,32.865 46.663,30.931 50.28,30.931
"NetAtmega 328p_28": "Atmega 328p.28" "Display pins.2" "RTC clock IC.6" | length 51.3
  Top Layer w0.381: 32.881,38.551 24.516,46.916 24.516,53.533 27.802,56.819 27.802,58.71 27.005,59.506 26.311,59.506 25.514,60.302 25.514,62.172 26.658,63.316 ; 26.658,63.316 26.7,63.358 26.7,63.4 26.658,63.358 26.658,63.316
  Bottom Layer w0.381: 32.881,38.551 32.881,38.481 32.8,38.4 33.032,38.4 37.961,33.471 50.28,33.471
"NetCR2032 Battery_2": "CR2032 Battery.2" "RTC clock IC.3" | length 25.6
  Top Layer w0.381: 34.278,63.316 34.278,63.222 34.3,63.2 34.394,63.2 46.343,51.251 46.343,42.779
NetLED_2: LED.2 R3.1 | length 10.8
  Bottom Layer w0.381: R3.1 23.356,72.144 23.3,72.2 26.28,72.2 28.559,69.921 31.231,69.921 LED.2
NetMistmaker_1: "TIP 120.2" Mistmaker.1 | length 26.4
  Top Layer w0.381: 20.054,36.519 18.81,35.275 18.81,14.268 21,12.078 21,11.8 21.081,11.881 Mistmaker.1
NetR4_2: "TIP 120.1" R4.2 | length 11.7
  Top Layer w0.381: 20.054,39.059 20.714,38.399 20.973,38.399 21.573,37.8 21.677,37.8 21.9,37.577 21.9,31.165 21.58,30.845 R4.2
NetR5_2: R5.2 RGB.1 | length 5.2
  Bottom Layer w0.381: RGB.1@13.857,71.596 RGB.1 14.5,72.172 R5.2 R5.2@14.454,67.854
NetR6_2: R6.2 RGB.2 | length 4.7
  Bottom Layer w0.381: R6.2 11,71.192 11.926,72.118 RGB.2
NetR7_2: R7.2 RGB.3 | length 5.5
  Bottom Layer w0.381: R7.2@7.4,67.973 7.254,67.973 7.327,67.9 R7.2 7.6,68.1 7.6,68.3 7.585,68.315 7.585,68.348 7.6,68.362 7.6,70.42 RGB.3
pads on no net: "Atmega 328p.1" "Atmega 328p.2" "Atmega 328p.3" "Atmega 328p.5" "Atmega 328p.14" "Atmega 328p.19" "Atmega 328p.21" "Atmega 328p.23" "Atmega 328p.24" "Atmega 328p.25" "Atmega 328p.26" "RTC clock IC.7"
copper on no net:
  other v1: 3,3 58,3 3,76 58,76

## Polygon pours and split planes (outlines as drawn)
GND on Top Layer "GND_L01_P002" (solid, pour order 2): 4.5,74.5 34.5,74.5 37,72 57,72 57.5,71.5 57.5,14.5 54.5,11.5 54.5,4.5 22,4.5 20,6.5 20,7 19.5,7.5 6.5,7.5
"5V net" on Bottom Layer "5V_NET_L02_P003" (solid, pour order 3): 4.5,74 5,74.5 34.5,74.5 37.5,71.5 57.5,71.5 57,71 57,4.5 4,4.5

## Silkscreen, mask and mechanical layers (free items; w line width, h text height)
Top Overlay:
  drawing of 15 lines, arcs and shapes, not listed

## Text inside footprints (layer, text, board x,y; h text height)
"Push buttons": Top Overlay "5" at 53.152,38.171 h1.02 r90; Top Overlay "1" at 53.152,28.271 h1.02 r90